# Altium PCB Ngoc_say2.PcbDoc
Units mm, origin at the board's own origin, x right, y up, seen from the top; angles counter-clockwise.
Board outline 90 x 55 mm, 2 copper layers (Top Layer, Bottom Layer); 58 components, 56 nets, 210 pads, 19 vias.
Unrouted connection lines stored in the file: 12.
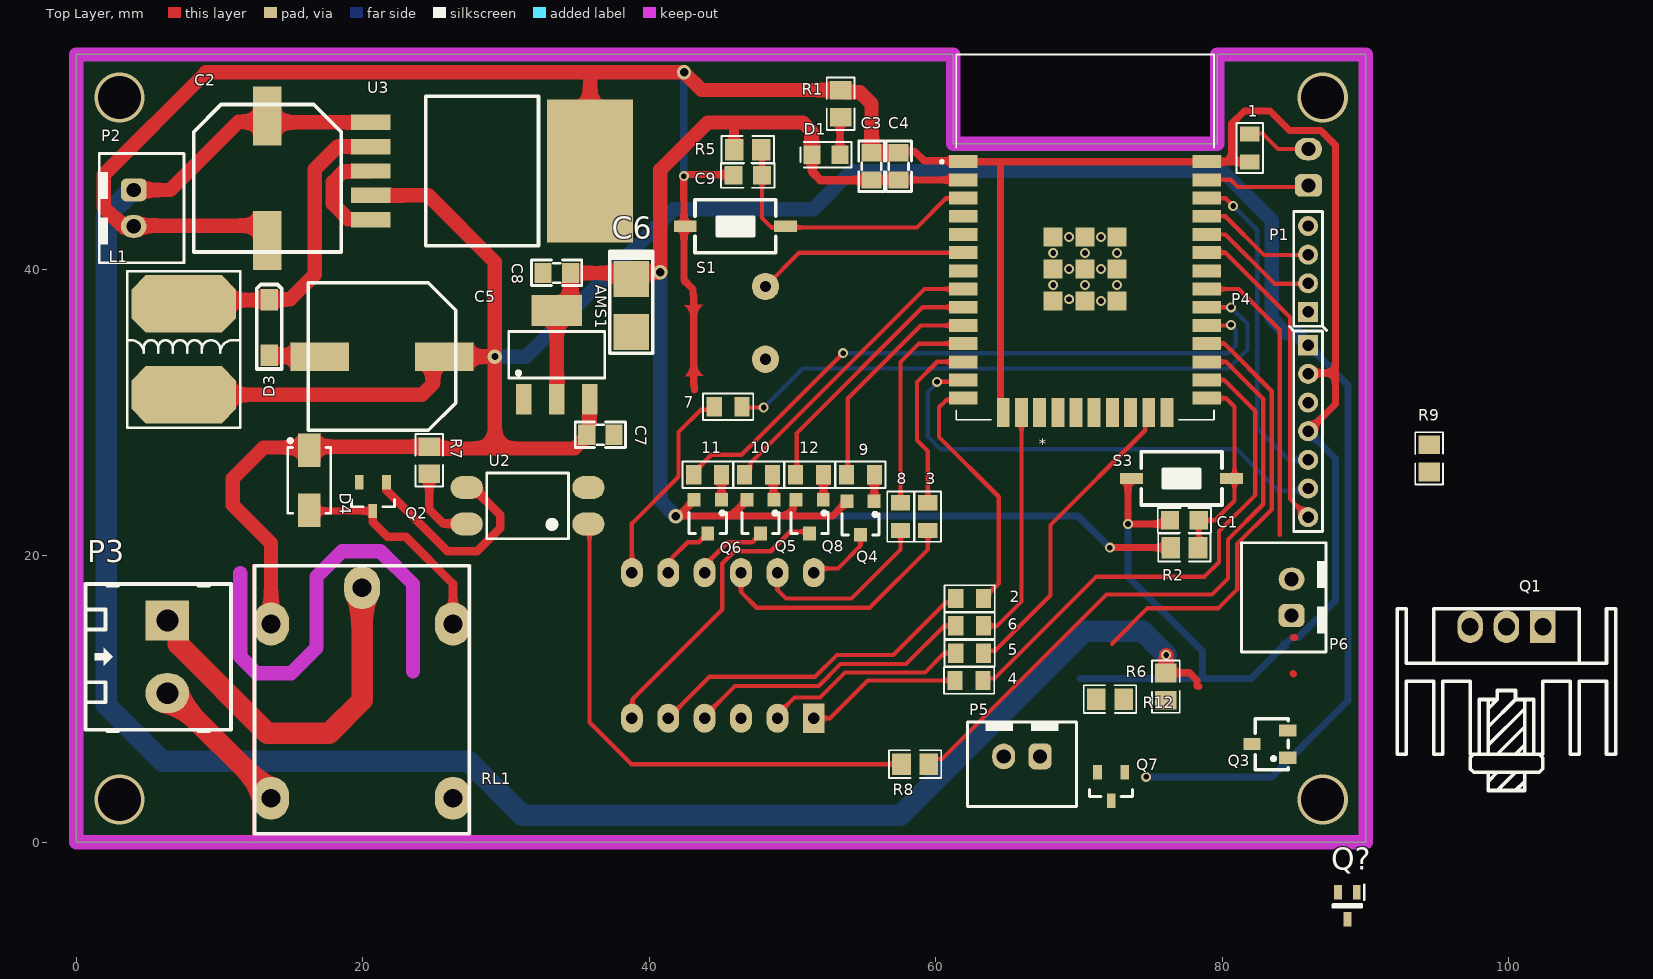
[diagram p0: Top Layer view]
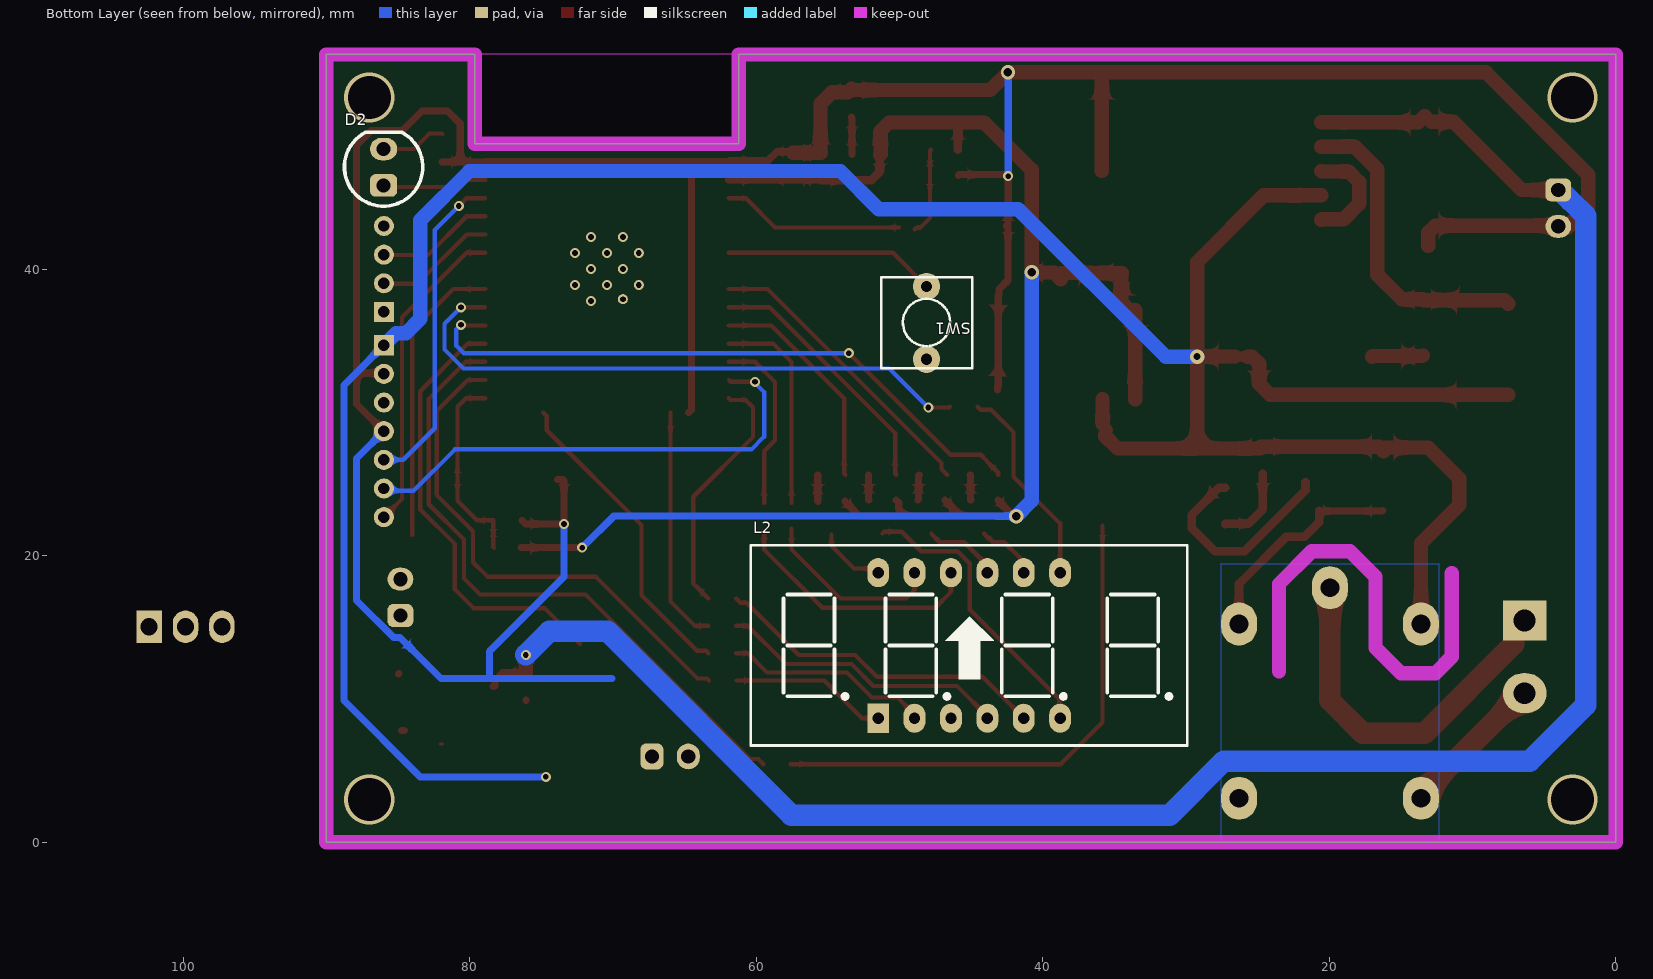
[diagram p1: Bottom Layer view, seen from below]
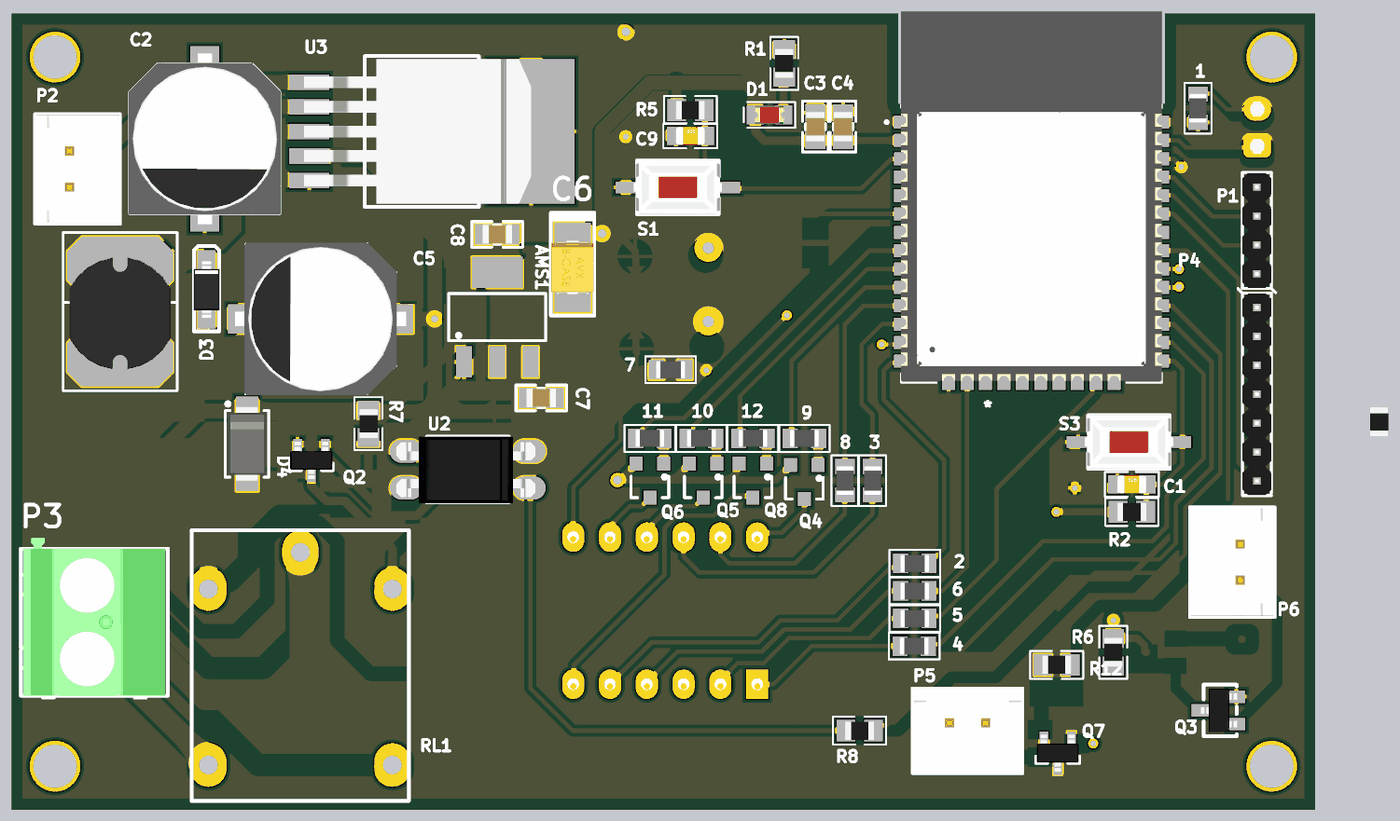
[diagram p2: 3D render of the assembled board from above, using the file's embedded part models]

## Layer stack, top to bottom
Top Solder: solder mask 0.0102, Solder Resist, Dk 3.5
Top Layer: signal copper 0.0356
Dielectric 1: dielectric 0.32, FR-4, Dk 4.8
Bottom Layer: signal copper 0.0356
Bottom Solder: solder mask 0.0102, Solder Resist, Dk 3.5

## Board outline
0,0 0,55 61.205,55 61.205,48.768 79.638,48.768 79.638,55 90,55 90,0

## Design rules (kind name [scope] priority, off if disabled: settings)
Clearance [All] p1: gap=0.254 ignorepadtopadclearanceinfootprint=FALSE except(0: Arc-Hole Track-Hole SMDPad-Hole THPad-Hole Via-Hole Fill-Hole Poly-Hole Region-Hole Text-Hole)
PolygonConnect [All] p1: connectstyle=Relief reliefconductorwidth=0.254 reliefentries=4 polygonreliefangle="90 Angle" airgapwidth=0.254
RoutingVias RoutingVias_Power [InNetClass('Power')] p1: holewidth=0.4 width=0.7 viastyle="Through Hole" minholewidth=0.4 minwidth=0.7 maxholewidth=0.4 maxwidth=0.7
RoutingVias RoutingVias_Signal [All] p2: holewidth=0.2 width=0.4 viastyle="Through Hole" minholewidth=0.2 minwidth=0.4 maxholewidth=0.2 maxwidth=0.4
SolderMaskExpansion [All] p1: expansion=0.102 istentingtop=FALSE
Width Width_Power [InNetClass('All Nets')] p1: maxlimit=2 minlimit=0.2 preferedwidth=0.5
Width Width_Signal [All] p2: maxlimit=0.2 minlimit=0.2 preferedwidth=0.2
30 further rules are at their usual default settings.

## Components (designator, comment, footprint, x,y, rotation, side; value= is the part's Value field where it differs from the comment)
1 "220R" "R 0805" 81.915,48.467 r270 top
2 "220R" "R 0805" 62.357,17.018 r0 top
3 "220R" "R 0805" 59.436,22.733 r90 top
4 "220R" "R 0805" 62.316,11.303 r0 top
5 "220R" "R 0805" 62.357,13.208 r0 top
6 "220R" "R 0805" 62.357,15.113 r0 top
7 "220R" "R 0805" 45.5,30.4 r0 top
8 "220R" "R 0805" 57.531,22.733 r90 top
9 "330R" "R 0805" 54.737,25.654 r180 top
10 "330R" "R 0805" 47.625,25.654 r180 top
11 "330R" "R 0805" 44.069,25.654 r180 top
12 "330R" "R 0805" 51.181,25.654 r180 top
* "ESP32 WROOM 32" ESP32-WROOM-32 70.412,42.255 r0 top
AMS1 "AMS1117-3.3V" SOT223 33.528,34.036 r0 top value="AMS1117-3.3V SOT223"
C1 "1uF" CAP_0805 77.343,22.479 r0 top
C2 "1000uF" "tu nhom 10 (G)" 13.335,46.355 r270 top
C3 "104" "Tu 0805" 55.499,47.197 r270 top
C4 "104" "Tu 0805" 57.404,47.197 r270 top
C5 "1000uF" "tu nhom 10 (G)" 21.336,33.909 r180 top
C6 "100uF" "tu tantalum smd3528" 38.735,37.465 r270 top
C7 "104" "Tu 0805" 36.576,28.448 r180 top
C8 "104" "Tu 0805" 33.528,39.751 r0 top
C9 "1uF" CAP_0805 46.863,46.562 r0 top
D1 "Led" "Led 0805 RED" 52.324,48.006 r0 top
D2 "Led" "LED 5MM - RED" 86,47.125 r90 bottom
D3 "ss34" SOD123 13.462,35.941 r90 top
D4 "M7" "DO-214AC (SMA) L" 16.256,25.273 r90 top
L1 "100uH - 3A SMD" "Cuon Cam 7.5x7x5" 7.493,38.227 r180 top
L2 "LED 7 Thanh" "LED 7x4 0.36" 45,14 r180 bottom
P1 "Header 4" HDR/Header/4/2mm 85.975,40.025 r90 top
P2 "power" HDR/Header/2/BOX 4,44.27 r0 top
P3 "Header 2" HDR/Terminal/2 6.35,12.954 r270 top
P4 "Header 7" HDR/Header/7/2mm 85.979,28.702 r270 top
P5 "led UVC" HDR/Header/2/BOX 66,6 r270 top
P6 "motor" HDR/Header/2/BOX 84.825,17.105 r180 top
Q1 "irf9z34n" TO-220/HeatSink 102.365,15.05 r180 top
Q2 "2n2222" SOT-23 20.701,24.13 r270 top
Q3 "C1815" SOT23B 83.439,6.985 r90 top
Q4 "A 1015" SOT23 54.737,22.638 r180 top
Q5 "A 1015" SOT23 47.752,22.733 r180 top
Q6 "A 1015" SOT23 44.069,22.733 r180 top
Q7 "Mosfet a03400" SOT-23 72.225,3.9 r270 top
Q8 "A 1015" SOT23 51.181,22.733 r180 top
Q? "BSS138PW_115" SOT65P210X110-3N 88.725,-4.425 r270 top
R1 "1K" RES_0805 53.34,51.562 r270 top
R2 "10K" RES_0805 77.343,20.574 r0 top
R5 "10K" RES_0805 46.863,48.34 r0 top
R6 "10K" RES_0805 76.058,10.874 r90 top
R7 "10K" RES_0805 24.638,26.67 r90 top
R8 "1K" RES_0805 58.547,5.461 r0 top
R9 "1K" RES_0805 94.425,26.8 r270 top
R12 "1K" RES_0805 72.15,10 r180 top
RL1 "MH" RELAY5PIN-10A 19.939,17.78 r180 top value="Relay 5V - 10A"
S1 "MH001036" SW-SMD 46,43 r180 top value="Nút Nhấn 2 Chân 3x6x2.5MM SMD"
S3 "MH001036" SW-SMD 77.145,25.4 r180 top value="Nút Nhấn 2 Chân 3x6x2.5MM SMD"
SW1 "Nut Nhan 2 Chan ( Dip )" SW2 48.1,38.805 r270 bottom
U2 "OPTO PC817 SMD" SOP4 31.496,23.495 r180 top value=PC817
U3 "LM2576HVS 5.0V SMD" TO263-5 20.574,46.863 r270 top

## Footprints (in the part's own frame and the unit in brackets; to place one, negate y for a bottom-side part, rotate by r counter-clockwise, add the part's x,y. Pads: shape width x height; smd on the part's side, far side on the other; paste and mask are expansions set on the pad)
CAP_0805 [mm] "Ceramic Capacitor"
  rect 1.27x1.27 smd mask+0.076: 1(-1,0) 2(1,0)
  silkscreen extent -1.86,-0.86 1.86,0.86, body extent -1,-0.62 1,0.63, height 0.78
"Cuon Cam 7.5x7x5" [mm]
  oct 7.3x4 smd: 1(0,0.635) 2(0,6.985)
  silkscreen extent -3.94,-1.65 3.94,9.27, body extent -3.5,0.07 3.5,7.8, height 5.02
"DO-214AC (SMA) L" [mm] "Molded Diode, 2-Leads, Body 4.3x2.7mm, IPC Medium Density"
  rect 2.35x1.55 smd: 1(-2.1,0) 2(2.1,0)
  silkscreen extent -2.3,-1.5 2.89,1.5, body extent -2.6,-1.3 2.6,1.3, height 2.4
ESP32-WROOM-32 [mm]
  rect 2x0.9 smd: 1(-8.5,5.26) 2(-8.5,3.99) 3(-8.5,2.72) 4(-8.5,1.45) 5(-8.5,0.18) 6(-8.5,-1.09) 7(-8.5,-2.36) 8(-8.5,-3.63) 9(-8.5,-4.9) 10(-8.5,-6.17) 11(-8.5,-7.44) 12(-8.5,-8.71) 13(-8.5,-9.98) 14(-8.5,-11.25) 25(8.5,-11.25) 26(8.5,-9.98) 27(8.5,-8.71) 28(8.5,-7.44) 29(8.5,-6.17) 30(8.5,-4.9) 31(8.5,-3.63) 32(8.5,-2.36) 33(8.5,-1.09) 34(8.5,0.18) 35(8.5,1.45) 36(8.5,2.72) 37(8.5,3.99) 38(8.5,5.26)
  rect 0.9x2 smd: 15(-5.715,-12.25) 16(-4.445,-12.25) 17(-3.175,-12.25) 18(-1.905,-12.25) 19(-0.635,-12.25) 20(0.635,-12.25) 21(1.905,-12.25) 22(3.175,-12.25) 23(4.445,-12.25) 24(5.715,-12.25)
  rect 1.33x1.33 smd: 39(-2.232,-4.464) 39(-2.232,-2.232) 39(-2.232,0) 39(0,-4.464) 39(0,-2.232) 39(0,0) 39(2.232,-4.464) 39(2.232,-2.232) 39(2.232,0)
  round 0.7 hole 0.4: 39(-2.232,-3.348) 39(-2.232,-1.116) 39(-1.116,-4.34) 39(-1.116,-2.232) 39(-1.116,0) 39(0,-3.348) 39(0,-1.116) 39(1.116,-4.464) 39(1.116,-2.232) 39(1.116,0) 39(2.232,-3.348) 39(2.232,-1.116)
  Keep-Out Layer region: 9,6.45 -9,6.45 -9,12.75 9,12.75
  Keep-Out Layer region: 9,6.45 -9,6.45 -9,12.75 9,12.75
  silkscreen extent -10.1,-12.75 9,12.75, body extent -9,-12.62 9,12.88, height 3.2
HDR/Header/2/BOX [mm]
  rrect50% 1.8x1.6 hole 1: 1(0,1.27)
  oval 1.8x1.6 hole 1: 2(0,-1.27)
  silkscreen extent -2.41,-3.81 3.5,3.81, body extent -2.35,-3.7 3.4,3.7, height 7
HDR/Header/4/2mm [mm]
  rect 1.4x1.4 hole 0.8: 1(-3,0)
  round 1.4 hole 0.8: 2(-1,0) 3(1,0) 4(3,0)
  silkscreen extent -4.3,-1.3 4,1, body extent -3.98,-1 3.97,1, height 6
HDR/Header/7/2mm [mm]
  rect 1.4x1.4 hole 0.8: 1(-6,0)
  round 1.4 hole 0.8: 2(-4,0) 3(-2,0) 4(0,0) 5(2,0) 6(4,0) 7(6,0)
  silkscreen extent -7.3,-1.3 7,1, body extent -6.97,-1 6.97,1, height 6
HDR/Terminal/2 [mil] "Header 2, 2 pin, hight 400mil, Pin to Pin 200mil, Colour Green"
  rect 110x120 hole 60: 1(-100,0)
  oval 110x120 hole 60: 2(100,0)
  silkscreen extent -200,-225 205,175, body extent -229,-218 200,168, height 559
"LED 5MM - RED" [mil]
  rrect50% 62x75 hole 39: 1(-50,0)
  oval 62x75 hole 39: 2(50,0)
  silkscreen extent -107,-108 96,108, body extent -117,-118 96,118, height 340
"LED 7x4 0.36" [mil]
  rect 60x80 hole 31: 1(-255,-210)
  oval 60x80 hole 31: 2(-155,-210) 3(-55,-210) 4(45,-210) 5(145,-210) 6(245,-210) 7(245,190) 8(145,190) 9(45,190) 10(-55,190) 11(-155,190) 12(-255,190)
  silkscreen extent -605,-285 595,265, body extent -596,-291 586,260, height 170
"Led 0805 RED" [mm] "Led SMD 0805"
  rect 1.2x1.3 smd: 1(-0.975,0) 2(0.975,0)
  silkscreen extent -1.78,-0.89 1.78,0.89, body extent -1.01,-0.63 1.01,0.62, height 1.1
"R 0805" [mm] "Chip Resistor, 2-Leads, Body 2.0x1.3mm, IPC Medium Density"
  rect 1.05x1.35 smd: 1(-0.975,0) 2(0.975,0)
  silkscreen extent -1.75,-0.92 1.75,0.92, body extent -1,-0.61 1,0.59, height 0.5
RELAY5PIN-10A [mm]
  oval 2.5x3 hole 1.3: 1(0,0) 2(-6.35,14.7) 3(6.35,14.7) 4(-6.35,2.54) 5(6.35,2.54)
  silkscreen extent -7.49,-1.52 7.51,17.18, body extent -7.49,-1.52 7.49,17.14, height 16
RES_0805 [mm] "Resister"
  rect 1.3x1.5 smd mask+0.076: 1(0.95,0) 2(-0.95,0)
  silkscreen extent -1.83,-0.97 1.83,0.97, body extent -1,-0.63 1,0.62, height 0.5
SOD123 [mm]
  rect 1.5x1.2 smd: 1(-1.95,0) 2(1.95,0)
  silkscreen extent -2.9,-0.86 3,0.86, body extent -1.95,-0.9 1.95,0.9, height 1.18
SOP4 [mm]
  oval 2.25x1.6 smd: 1(-4.25,1.27) 2(-4.25,-1.27) 3(4.25,-1.27) 4(4.25,1.27)
  silkscreen extent -2.85,-2.3 2.85,2.3, body extent -4.67,-2.29 4.93,2.31, height 3.6
SOT23 [mm] "SOT-23; 3 Leads; Body 3.1 x 2.5 mm, inc. leads (LxW max), Alternate Lead Configuration"
  rect 0.9x0.95 smd: 1(-0.95,-1.175) 2(0,1.175) 3(0.95,-1.175)
  silkscreen extent -1.3,-0.38 1.3,1.18
SOT23B [mm] "SOT 23B"
  rect 0.85x1.2 smd: 1(-1.077,-1.123) 2(-0.127,1.377) 3(0.813,-1.118)
  silkscreen extent -1.91,-1.14 1.65,1.14, body extent -1.63,-1.17 1.37,1.33, height 1.06
SOT65P210X110-3N [mm]
  rect 1x0.55 smd: 1(-0.95,0.65) 2(-0.95,-0.65) 3(0.95,0)
  silkscreen extent -1.45,-1 0.1,1.17
SOT223 [mm] "SOT-223/SC-73; 4 Leads; Body 6.7 x 7.3 mm, inc. leads (LxW max)"
  rect 1.1x2.15 smd: 1(-2.3,-3.1) 2(0,-3.1) 3(2.3,-3.1)
  rect 3.5x2.15 smd: 4(0,3.1)
  silkscreen extent -3.35,-1.63 3.35,1.63, body extent -3.43,-1.65 3.43,1.65, height 2.54
SOT-23 [mm] "SOT23, 3-Leads, Body 3.0x2.5mm (max), Pitch 0.95mm, IPC Medium Density"
  rect 1x0.6 smd: 1(-1,0.95) 2(-1,-0.95) 3(1,0)
  silkscreen extent 0.2,-1.5 0.7,1.5, body extent -1.28,-1.46 1.27,1.46, height 0.95
SW2 [mil] "SW button 2pin, 250x 250 mil"
  round 75 hole 31: 1(0,0) 2(200,0)
  silkscreen extent -25,-125 225,125
SW-SMD [mm] "Switch SMD type"
  rect 1.6x0.8 smd: 1(-3.5,0) 2(3.5,0)
  silkscreen extent -2.82,-1.85 2.82,1.85, body extent -3.05,-1.85 3.05,1.85, height 2.5
TO263-5 [mm] "LM2576-SMD"
  rect 1.07x2.75 smd: 1(-3.4,-0.025) 2(-1.7,-0.025) 3(0,-0.025) 4(1.7,-0.025) 5(3.4,-0.025)
  rect 10x6 smd: 6(0,15.289)
  silkscreen extent -5.21,3.81 5.21,11.68, body extent -5,-0.38 5,15.29, height 4.79
TO-220/HeatSink [mil]
  rect 70x90 / inner rect 70x70 / far side rect 70x90 hole 47.24: 1(0,0)
  oval 70x90 / inner round 70 / far side oval 70x90 hole 47.24: 2(100,0) 3(200,0)
  silkscreen extent -200,-50 400,450, body extent -191,-52 391,374, height 984
"Tu 0805" [mm] "Compoment SMD 80x50mil"
  rect 1.2x1.4 smd: 1(-0.946,-0.003) 2(0.954,-0.003)
  silkscreen extent -1.75,-0.89 1.75,0.89, body extent -1.01,-0.64 1.01,0.63, height 0.61
"tu nhom 10 (G)" [mm]
  rect 4.1x2 smd: 1(-4.35,0) 2(4.35,0)
  silkscreen extent -5.15,-5.15 5.15,5.15, body extent -5.9,-5.25 5.9,5.25, height 10.5
"tu tantalum smd3528" [mm]
  rect 2.5x2.5 smd: 1(-1.85,0) 2(1.85,0)
  silkscreen extent -3.78,-1.5 3.33,1.5, body extent -1.85,-1.46 1.85,1.47, height 2.03

## Part data
1 2 3 4 5 6 7 8 9 10 11 12: library part Resistor, "Resistor"
AMS1: library part "AMS1117 SMD", "Dán", Chung_Loai=Dán, Don_Vi=Con, Ma_Hang=MH000596
C1 C9: library part CAP_1uF-50V-5%-0805, "1µF ±5% 50V Ceramic Capacitor X7R 0805 (2012 Metric)", Case/Package="0805 (2012 Metric)", Manufacturer=Yageo, Manufacturing Part Number=CC0805JKX7R9BB105, Supplier Part Number-1=311-3498-1-ND, Supplier-1=Digikey
C2 C5: library part "Tu Nhom 1000uF 16V", "Dán", Chung_Loai=Dán, Don_Vi=Con, Ma_Hang=MH004419, So_Chan=2, Ten_Linh_Kien="Tụ Nhôm 1000uF 16V 10x10MM"
C3 C4 C7 C8: library part "Tu 104", "Dán", Chung_Loai=Dán, Don_Vi=Con, Ma_Hang=MH004551, Ten_Linh_Kien="Tụ 0805 104-100nF 10% 50V"
C6: library part "Tu tantalum 100uF 6.3V SMD3528", "Dán", Chung_Loai=Dán, Don_Vi=Con, Ma_Hang=MH007595, So_Chan=2, Ten_Linh_Kien="Tụ tantalum 107J-100uF 6.3V SMD3528"
D1 D2: "Typical LED"
D3: library part "Diode Schottky", "Schottky Diode"
D4: library part Diode, "Default Diode"
L1: library part "CUON CAM 100uH_SMD", "Dán", Chung_Loai=Dán, Don_Vi=Con, Ten_Linh_Kien="Cuộn Cảm 100uH 7x7x4MM CD74"
L2: library part "LED 7x4 0.36 Anot", "Dán", Chung_Loai=Dán, Don_Vi=Con, Ma_Hang=MH001048, Ten_Linh_Kien="Led 7 0.36 4 Số Anot (Sáng Đỏ)"
P1: "Header, 4-Pin"
P2 P5 P6: library part "Header 2", "Header, 2-Pin"
P3: "Header, 2-Pin"
P4: "Header, 7-Pin"
Q1: library part "Mosfet P", "Mosfet P"
Q2: library part "Transistor NPN", "NPN Bipolar Transistor"
Q3 U3: "Dán", Chung_Loai=Dán, Don_Vi=Con
  Q3: Ma_Hang=MH000946, Ten_Linh_Kien="C1815 SOT23 TRANS NPN 0.15A 50V (SMD-HF)"
  U3: Ma_Hang=MH002362, Ten_Linh_Kien="LM2576HVS-5.0V BUCK 5V 3A TO263-5"
Q4 Q5 Q6 Q8: library part 2SA1015, "Dán", Chung_Loai=Dán, Don_Vi=Con, Ma_Hang=MH001957, Ten_Linh_Kien="A1015 SOT23 TRANS PNP 0.15A 50V ( SMD-BA)"
Q7: library part "Mosfet N", "Mosfet N"
Q?: "BSS138PW,115 N-Channel MOSFET, 320 mA, 60 V, 3-Pin SOT-323 Nexperia", Manufacturer_Name=Nexperia, Manufacturer_Part_Number=BSS138PW,115, Mouser Part Number=771-BSS138PW115, Datasheet Link=https://assets.nexperia.com/documents/data-sheet/BSS138PW.pdf, Geometry.Height=1.1mm, Mouser Price/Stock=https://www.mouser.co.uk/ProductDetail/Nexperia/BSS138PW115?qs=A1cBxND5mHKdv5mYHLzmBw%3D%3D
R1 R8 R9 R12: library part RES_1K-0.125W-1%-0805, "1 kOhms ±1% 0.125W, 1/8W Chip Resistor 0805 (2012 Metric) Moisture Resistant Thick Film", Case/Package=0805, Manufacturer=垈㎵á, Manufacturer Part Number=RC0805FR-071KL, Supplier Part Number-1=311-1.00KCRCT-ND, Supplier-1=Digikey
R2 R5 R6 R7: library part RES_10K-0.125W-1%-0805, "10 kOhms ±1% 0.125W, 1/8W Chip Resistor 0805 (2012 Metric) Moisture Resistant Thick Film", Case/Package=0805, Manufacturer=Yageo, Manufacturing Part Number=RC0805FR-0710KL, Supplier Part Number-1=311-10.0KCRCT-ND, Supplier-1=Digikey
RL1: library part "Relay 10A", "Cắm"
S1 S3: library part SW-SMD, "Dán"
SW1: "Cắm", Chung_Loai=Cắm, Don_Vi=Con, Ma_Hang=MH001959, Ten_Linh_Kien="Nút Nhấn 2 Chân 6x6x5MM DIP"
U2: "Single Opto"

## Via types
v1: diameter 0.7, hole 0.4, Top Layer to Bottom Layer, 11 vias
v2: diameter 3.5, hole 3, Top Layer to Bottom Layer, 4 vias
v3: diameter 1, hole 0.6, Top Layer to Bottom Layer, 3 vias
v4: diameter 1, hole 0.5, Top Layer to Bottom Layer, 1 vias

## Nets (pads, with @x,y where several pads share a name; then routed paths per layer and width w, separated by ;. In a path a pad name is that pad's centre, name@x,y a point inside that pad or via, vN(x,y) a via of type N, cw(c..) or ccw(c..) an arc to the next point about the centre after c; other vN are vias at no path point)
3.3V: *.2 AMS1.2 AMS1.4 C3.2 C4.2 C6.1 C8.2 D1.1 P1.4 Q4.3 Q5.3 Q6.3 Q8.3 R2.2 R5.2 | length 120.7
  Top Layer w0.5: v3(41.834,22.771) v3@42.007,22.771 ; Q6.3 43.119,23.883 v3@42.007,22.771 ; Q5.3 46.802,23.883 45.69,22.771 ; Q8.3 50.038,23.715 50.038,23.241 49.568,22.771 ; Q4.3 53.787,23.788 52.77,22.771 49.568,22.771 ; C3.2 C4.2 57.402,46.244 61.911,46.244 *.2 ; v1(72.136,20.574) R2.2 ; v3@42.007,22.771 45.69,22.771 ; 45.69,22.771 49.568,22.771
  Top Layer w0.6: R5.2 45.913,50.242 ; D1.1 51.364,47.991 51.364,46.807 51.943,46.228 55.481,46.228 C3.2
  Top Layer w1: AMS1.2 AMS1.4 33.937,37.136 34.512,37.711 34.512,39.718 C8.2 C6.1@38.683,39.748 ; C6.1 39.199,39.779 40.739,39.779 v3(40.767,39.807) 40.767,46.943 44.069,50.245 45.91,50.245 ; 45.913,50.242 45.91,50.245 ; D1.1 51.308,48.047 51.308,49.659 50.722,50.245 45.91,50.245
  Bottom Layer w0.5: v3(41.834,22.771) 69.939,22.771 v1(72.136,20.574)
  Bottom Layer w1: v3(40.767,39.807) 40.767,23.838 v3(41.834,22.771)
5V: AMS1.3 C5.1 C7.2 D4.2 L1.2 P4.1 P5.1 R7.1 RL1.5 U3.4 | length 200.7
  Top Layer w0.6: C5.1 C5.1@26.563,33.909 ; C7.2@35.389,28.785 35.814,29.21 ; AMS1.3@35.814,30.922 AMS1.3
  Top Layer w1: L1.2 24.13,31.242 24.883,31.995 24.883,33.409 25.383,33.909 C5.1 ; RL1.5 13.589,20.888 10.922,23.555 10.922,25.4 13.081,27.559 16.07,27.559 D4.2 ; D4.2@16.188,27.305 16.503,27.62 R7.1@24.765,27.62 ; U3.4 24.56,45.163 29.21,40.513 v4(29.21,33.909) 29.21,27.495 ; R7.1 24.763,27.495 29.21,27.495 ; C5.1@26.563,33.909 v4@29.083,33.909 ; C7.2 35.622,28.351 34.766,27.496 29.21,27.496 ; 35.814,29.21 AMS1.3@35.814,30.922
  Bottom Layer w0.5: v1(74.676,4.572) 83.439,4.572 88.773,9.906 88.773,31.908 P4.1
  Bottom Layer w1: v4(29.21,33.909) 31.409,33.909 41.7,44.2 51.439,44.2 54.102,46.863 80.01,46.863 83.439,43.434 83.439,36.541 84.434,35.546 85.135,35.546 P4.1
A: 8.2 *.11 | length 14.7
  Top Layer w0.3: 8.2 57.531,33.528 58.818,34.815 *.11
B: 7.2 *.30 | length 42.1
  Top Layer w0.2: *.30 *.30@78.917,37.35
  Top Layer w0.3: 7.2 46.525,30.35 v1(47.975,30.35) ; *.30@78.917,37.35 v1(80.6,37.35)
  Bottom Layer w0.3: v1(47.975,30.35) 50.7,33.075 80.425,33.075 81.75,34.4 81.75,36.2 v1(80.6,37.35)
BCLK: *.13 P4.6 | length 34.2
  Top Layer w0.2: *.13@61.895,32.258 *.13
  Top Layer w0.3: v1(60.071,32.146) 61.783,32.146 *.13@61.895,32.258
  Bottom Layer w0.3: v1(60.071,32.146) 60.071,32.072 59.436,31.437 59.436,28.321 60.325,27.432 81.026,27.432 83.918,24.54 85.817,24.54 P4.6
BOOT: *.25 C1.2 R2.1 S3.1 | length 13.7
  Top Layer w0.3: R2.1 78.343,20.624 C1.2 79.479,22.479 80.843,23.843 80.843,25.32 80.843,30.409 80.247,31.005 *.25
button1: *.6 SW1.1 | length 14.8
  Top Layer w0.3: SW1.1 50.46,41.165 *.6
C: 6.2 *.16 | length 16.5
  Top Layer w0.3: 6.2 64.262,15.113 65.967,16.818 *.16
D: 5.2 *.23 | length 21.9
  Top Layer w0.3: 5.2 63.505,13.381 64.131,13.381 68,17.25 68,22.15 74.613,28.763 74.613,29.761 *.23
DIN: *.36 P4.5 | length 22.7
  Top Layer w0.2: *.36 *.36@78.929,44.958
  Top Layer w0.3: *.36@78.929,44.958 80.217,44.958 v1(80.75,44.425)
  Bottom Layer w0.3: v1(80.75,44.425) 82.423,42.752 82.423,28.909 84.63,26.702 P4.5
E: 4.2 *.26 | length 35.8
  Top Layer w0.3: 4.2 63.428,11.44 64.09,11.44 71.2,18.55 78.748,18.55 79.756,19.558 79.756,21.717 82.296,24.257 82.296,30.099 80.12,32.275 *.26
F: 3.2 *.12 | length 12.6
  Top Layer w0.3: 3.2 59.436,27.305 58.674,28.067 58.674,32.131 60.088,33.545 *.12
G: 2.2 *.14 | length 17.5
  Top Layer w0.3: *.14 61.791,30.884 60.729,30.884 60.217,30.372 60.217,28.302 64.389,24.13 64.389,18.075 2.2
GND: 1.2 *.1 *.15 *.38 AMS1.1 C1.1 C2.2 C3.1 C4.1 C5.2 C6.2 C7.1 C8.1 C9.1 D3.1 P1.1 P2.2 P4.2 P4.4 P6.2 Q2.2 Q3.3 Q7.2 R1.2 S1.2 S3.2 SW1.2 U2.2 U3.3 U3.5 U3.6 | length 251
  Top Layer w0.5: 43.149,31.591 43.149,31.848 43.098,31.898 43.098,38.172 43.047,38.223 43.047,38.603 42.418,39.232 42.418,42.918 S1.2 42.5,43.068 42.418,43.15 42.418,44.816 42.4,44.834 v1(42.4,46.5) 42.509,46.609 45.816,46.609 C9.1 ; C4.1 57.471,48.213 58.547,48.213 59.182,47.578 61.849,47.578 *.1 64.516,47.515 ; *.15 64.516,30.186 64.516,47.515 ; S3.2@73.843,25.32 73.476,25.32 73.406,25.25 v1(73.406,22.225) 76.089,22.225 C1.1 ; 1.2 81.903,47.503 80.645,47.503 ; Q3.3 Q3.3@84.732,7.798 ; 84.963,14.304 85.063,14.304 ; P4.4 87.884,30.607 87.884,32.766 ; P4.2 86.043,32.766 87.884,32.766 ; 64.516,47.515 *.38 78.924,47.503 80.645,47.503 ; 80.645,47.503 80.645,50.165 81.534,51.054 83.312,51.054 84.68,49.686 86.864,49.686 87.884,48.666 87.884,37 87.884,32.766
  Top Layer w1: P2.2@3.947,43.053 12.581,43.053 13.081,42.553 C2.2@13.081,41.624 ; P2.2 3.885,43.115 3.113,43.115 1.905,44.323 1.905,46.609 9.042,53.746 35.941,53.746 ; D3.1 13.503,33.95 16.945,33.95 C5.2 ; U3.5 20.514,43.498 18.986,43.498 17.907,44.577 17.907,46.101 18.634,46.828 20.514,46.828 U3.3 ; U3.6 35.863,53.668 35.941,53.746 ; R1.2 43.652,52.512 v3(42.418,53.746) 35.941,53.746 ; R1.2@53.34,52.612 53.59,52.362 54.699,52.362 55.499,51.562 55.499,48.243 55.496,48.239 C3.1 C4.1
  Bottom Layer w0.5: v1(42.4,46.5) 42.4,53.728 v3(42.418,53.746) ; 70.06,11.43 78.613,11.43 ; v1(73.406,22.225) 73.406,18.542 78.613,13.335 78.613,11.43 ; P4.4 87.884,26.797 87.884,16.891 85.297,14.304 84.963,14.304 84.863,14.304 81.989,11.43 78.613,11.43
led5mm: *.37 D2.1 | length 7.3
  Top Layer w0.3: *.37 80.581,46.245 81.075,45.751 85.896,45.751 D2.1
ledUV: *.28 R12.2 | length 31.1
  Top Layer w0.3: 72.286,13.861 74.775,16.35 79.725,16.35 81.026,17.651 81.026,20.828 83.439,23.241 83.439,31.496 80.12,34.815 *.28
LRC: *.33 P4.7 | length 22.1
  Top Layer w0.3: *.33 80.2,41.165 84.709,36.656 84.709,23.972 P4.7
Net1_1: 1.1 D2.2 | length 4.6
  Top Layer w0.3: 1.1 81.956,49.483 82.804,49.483 83.881,48.406 85.989,48.406 D2.2
Net2_1: 2.1 L2.5 | length 23.5
  Top Layer w0.3: L2.5 41.317,8.678 44.196,11.557 51.562,11.557 53.086,13.081 57.023,13.081 60.674,16.732 61.096,16.732 2.1
Net3_1: 3.1 L2.10 | length 17.8
  Top Layer w0.3: L2.10 46.397,17.484 47.498,16.383 55.372,16.383 59.436,20.447 3.1
Net4_1: 4.1 L2.1 | length 11
  Top Layer w0.3: L2.1 52.608,8.666 55.245,11.303 4.1
Net5_1: 5.1 L2.2 | length 14.5
  Top Layer w0.3: L2.2 48.937,8.92 50.131,10.114 51.918,10.114 53.661,11.857 59.228,11.857 60.579,13.208 5.1
Net6_1: 6.1 L2.4 | length 20.3
  Top Layer w0.3: L2.4 43.857,8.805 45.974,10.922 51.816,10.922 53.34,12.446 57.912,12.446 60.579,15.113 6.1
Net7_1: 7.1 L2.7 | length 14.4
  Top Layer w0.3: L2.7 38.777,22.267 42.037,25.527 42.037,28.637 43.6,30.2 44.325,30.2 7.1
Net8_1: 8.1 L2.11 | length 12.9
  Top Layer w0.3: L2.11 48.937,17.611 49.53,17.018 54.102,17.018 57.531,20.447 8.1@57.531,21.908
Net9_1: 9.1 Q4.1 | length 1.9
  Top Layer w0.5: Q4.1 55.699,23.825 55.699,25.642 9.1
Net10_1: 10.1 Q5.1 | length 1.8
  Top Layer w0.5: 10.1 48.651,25.603 48.651,23.959 Q5.1
Net11_1: 11.1 Q6.1 | length 1.8
  Top Layer w0.5: Q6.1 45.032,23.92 45.032,25.642 11.1
Net12_1: 12.1 Q8.1 | length 1.8
  Top Layer w0.5: Q8.1 52.144,23.92 52.144,25.642 12.1
NetD1_2: D1.2 R1.1 | length 2.6
  Top Layer w0.5: D1.2 53.299,50.571 R1.1
NetD3_2: D3.2 L1.1 U3.2 | length 21.9
  Top Layer w1: L1.1 7.747,37.846 13.417,37.846 13.477,37.906 14.919,37.906 16.637,39.624 16.637,46.99 18.21,48.563 U3.2
NetD4_1: D4.1 Q2.3 RL1.4 | length 15.4
  Top Layer w0.5: D4.1 16.299,23.13 Q2.3
  Top Layer w0.6: Q2.3 20.701,22.352 21.717,21.336 22.987,21.336 26.289,18.034 RL1.4
NetL2_6: L2.6 Q8.2 | length 20.5
  Top Layer w0.3: L2.6 38.777,8.796 38.818,8.837 38.818,9.992 45.082,16.256 45.082,19.473 45.929,20.32 48.469,20.32 49.834,21.685 51.054,21.685 Q8.2
NetL2_8: L2.8 Q6.2 | length 4.4
  Top Layer w0.3: L2.8 41.551,19.06 41.551,19.834 42.672,20.955 43.466,20.955 43.744,21.233 43.769,21.233 44.069,21.533 Q6.2
NetL2_9: L2.9 Q5.2 | length 5.3
  Top Layer w0.3: L2.9 43.857,19.346 45.466,20.955 47.174,20.955 47.752,21.533 Q5.2
NetL2_12: L2.12 Q4.2 | length 4.8
  Top Layer w0.3: L2.12 51.774,19.123 53.159,19.123 54.737,20.701 Q4.2
NetP3_1: P3.1 RL1.1 | length 26.3
  Top Layer w1.5: P3.1 6.477,15.494 7.124,14.847 7.124,13.831 13.335,7.62 17.653,7.62 19.939,9.906 RL1.1
NetP3_2: P3.2 RL1.3 | length 10.4
  Top Layer w1.5: P3.2 6.491,10.414 13.589,3.316 RL1.3
NetP5_2: P5.2 Q7.3
NetP6_1: P6.1 Q1.3 | length 0
  Top Layer w0.5: 84.933,11.794 84.963,11.764
NetQ1_1: Q1.1 Q3.2 R6.2 | length 0.2
  Top Layer w0.2: Q3.2@81.887,6.858 Q3.2
NetQ2_1: Q2.1 U2.3 | length 15
  Top Layer w0.6: Q2.1 21.651,24.577 25.908,20.32 27.97,20.32 29.591,21.941 29.591,22.86 27.686,24.765 U2.3
NetQ3_1: Q3.1 R9.1
NetQ7_1: Q7.1 R12.1
NetR7_2: R7.2 U2.4 | length 5.5
  Top Layer w0.6: R7.2 24.638,23.241 25.635,22.244 27.227,22.244 U2.4
NetR8_2: R8.2 U2.1 | length 36.7
  Top Layer w0.3: U2.1@35.814,22.11 35.814,8.382 38.735,5.461 R8.2
NRST: *.3 C9.2 R5.1 S1.1 | length 18.9
  Top Layer w0.3: R5.1 47.863,48.29 C9.2 47.863,43.577 48.517,42.923 48.8,42.923 48.92,42.803 S1.1@48.92,42.798 ; S1.1@50.02,42.926 58.674,42.926 60.706,44.958 61.895,44.958 *.3
PWM: *.31 R9.2 | length 20.6
  Top Layer w0.3: *.31 81.136,38.625 83.993,35.768 83.993,21.47
relay: *.27 R8.1 | length 44.8
  Top Layer w0.3: R8.1 59.857,5.821 60.421,5.821 71.9,17.3 79.276,17.3 80.391,18.415 80.391,21.145 82.85,23.604 82.85,30.942 80.247,33.545 *.27
RXD: *.34 P1.2 | length 8.5
  Top Layer w0.3: *.34 80.2,42.435 83.635,39 85.95,39 P1.2
seg1: 9.2 *.10 | length 15.5
  Top Layer w0.3: 9.2 53.848,25.74 53.848,30.988 58.945,36.085 *.10
seg2: 10.2 *.8 | length 20.9
  Top Layer w0.3: 10.2 47.051,26.055 47.051,26.477 59.199,38.625 *.8
seg3: 11.2 *.29 | length 45
  Top Layer w0.3: 11.2 43.094,25.804 43.921,26.631 43.921,26.649 44.323,27.051 46.426,27.051 v1(53.525,34.15) ; *.29 80.533,36.085 80.573,36.125 v1(80.6,36.125)
  Bottom Layer w0.3: v1(53.525,34.15) 80.4,34.15 80.925,34.675 80.925,35.8 v1(80.6,36.125)
seg4: 12.2 *.9 | length 18.2
  Top Layer w0.3: 12.2 50.292,25.74 50.292,28.575 59.072,37.355 *.9
TXD: *.35 P1.3 | length 8.2
  Top Layer w0.3: *.35 80.2,43.705 82.905,41 85.95,41 P1.3
Vin: C2.1 P2.1 Q1.2 R6.1 U3.1 | length 142.3
  Top Layer w0.5: R6.1@76.073,11.839 77.696,11.839 78.232,11.303 78.232,10.924 78.282,10.874 78.36,10.874
  Top Layer w1: P2.1 6.551,45.54 11.316,50.305 C2.1@12.835,50.305 ; C2.1 13.777,50.263 U3.1 ; R6.1@76.073,11.839 v1(76.073,13.081)
  Bottom Layer w1.5: P2.1 3.9,45.54 3.164,44.804 3.153,44.804 2.096,43.747 2.096,9.588 6.005,5.679 27.35,5.679 31.124,1.905 57.531,1.905 70.358,14.732 74.422,14.732 v1(76.073,13.081)
pads on no net: *.4 *.5 *.7 *.17 *.18 *.19 *.20 *.21 *.22 *.24 *.32 *.39 L2.3 P4.3 Q?.1 Q?.2 Q?.3 RL1.2
copper on no net:
  other v2: 3,3 87,3 3,52 87,52

## Polygon pours and split planes (outlines as drawn)
GND on Top Layer "NONET_L01_P006" (solid, remove dead copper, shelved, pour order 6): 0,55 0,0 12.319,0 12.319,19.431 27.559,19.431 27.559,0 90,0 90,55 79.675,55 79.675,48.75 61.2,48.75 61.2,55
GND on Top Layer "NONET_L01_P003" (solid, remove dead copper, shelved, pour order 3): 0,55 0,0 12.319,0 12.319,19.431 27.559,19.431 27.559,0 90,0 90,55 79.675,55 79.675,48.75 61.2,48.75 61.2,55
GND on Top Layer "NONET_L01_P002" (solid, remove dead copper, shelved, pour order 2): 0,55 0,0 12.319,0 12.319,19.431 27.559,19.431 27.559,0 90,0 90,55 79.675,55 79.675,48.75 61.2,48.75 61.2,55
GND on Top Layer "NONET_L01_P000" (solid, remove dead copper, shelved, pour order 0): 0,55 0,0 0.5,0.5 90,0.5 90,55 79.675,55 79.675,48.75 61.2,48.75 61.2,55
GND on Bottom Layer "NONET_L02_P008" (solid, remove dead copper, shelved, pour order 8): 0,55 0,0 12.3,0 12.3,19.425 27.55,19.425 27.55,0 90,0 90,55 79.65,55 79.65,48.75 61.2,48.75 61.2,55
GND on Bottom Layer "NONET_L02_P005" (solid, remove dead copper, shelved, pour order 5): 0,55 0,0 12.3,0 12.3,19.425 27.55,19.425 27.55,0 90,0 90,55 79.65,55 79.65,48.75 61.2,48.75 61.2,55
GND on Bottom Layer "NONET_L02_P001" (solid, remove dead copper, shelved, pour order 1): 0,55 0,0 90,0 90,55 79.65,55 79.65,48.75 61.2,48.75 61.2,55

## Keep-outs
Keep-Out Layer:
  lines w1: 11.43,18.796 11.43,12.954 12.573,11.811 14.986,11.811 16.764,13.589 16.764,18.542 18.542,20.32 21.209,20.32 23.495,18.034 23.495,11.938 ; 0,0 90,0 90,55 79.638,55 79.638,48.768 73.406,48.768 67.437,48.768 61.205,48.768 61.205,55 0,55 0,0

## Dimensions
0,55 to 0,0 on Mechanical 10
0,55 to 90,55 on Mechanical 10

## Text inside footprints (layer, text, board x,y; h text height)
*: Mechanical 13 "ANTENNA" at 64.412,51.255 h1.78